# Altium PCB Buck_PCB.PcbDoc
Units mm, origin at the board's own origin, x right, y up, seen from the top; angles counter-clockwise.
Board outline 33.53 x 25.91 mm, 2 copper layers (Top Layer, Bottom Layer); 11 components, 6 nets, 30 pads, 5 vias.
Unrouted connection lines stored in the file: 7.
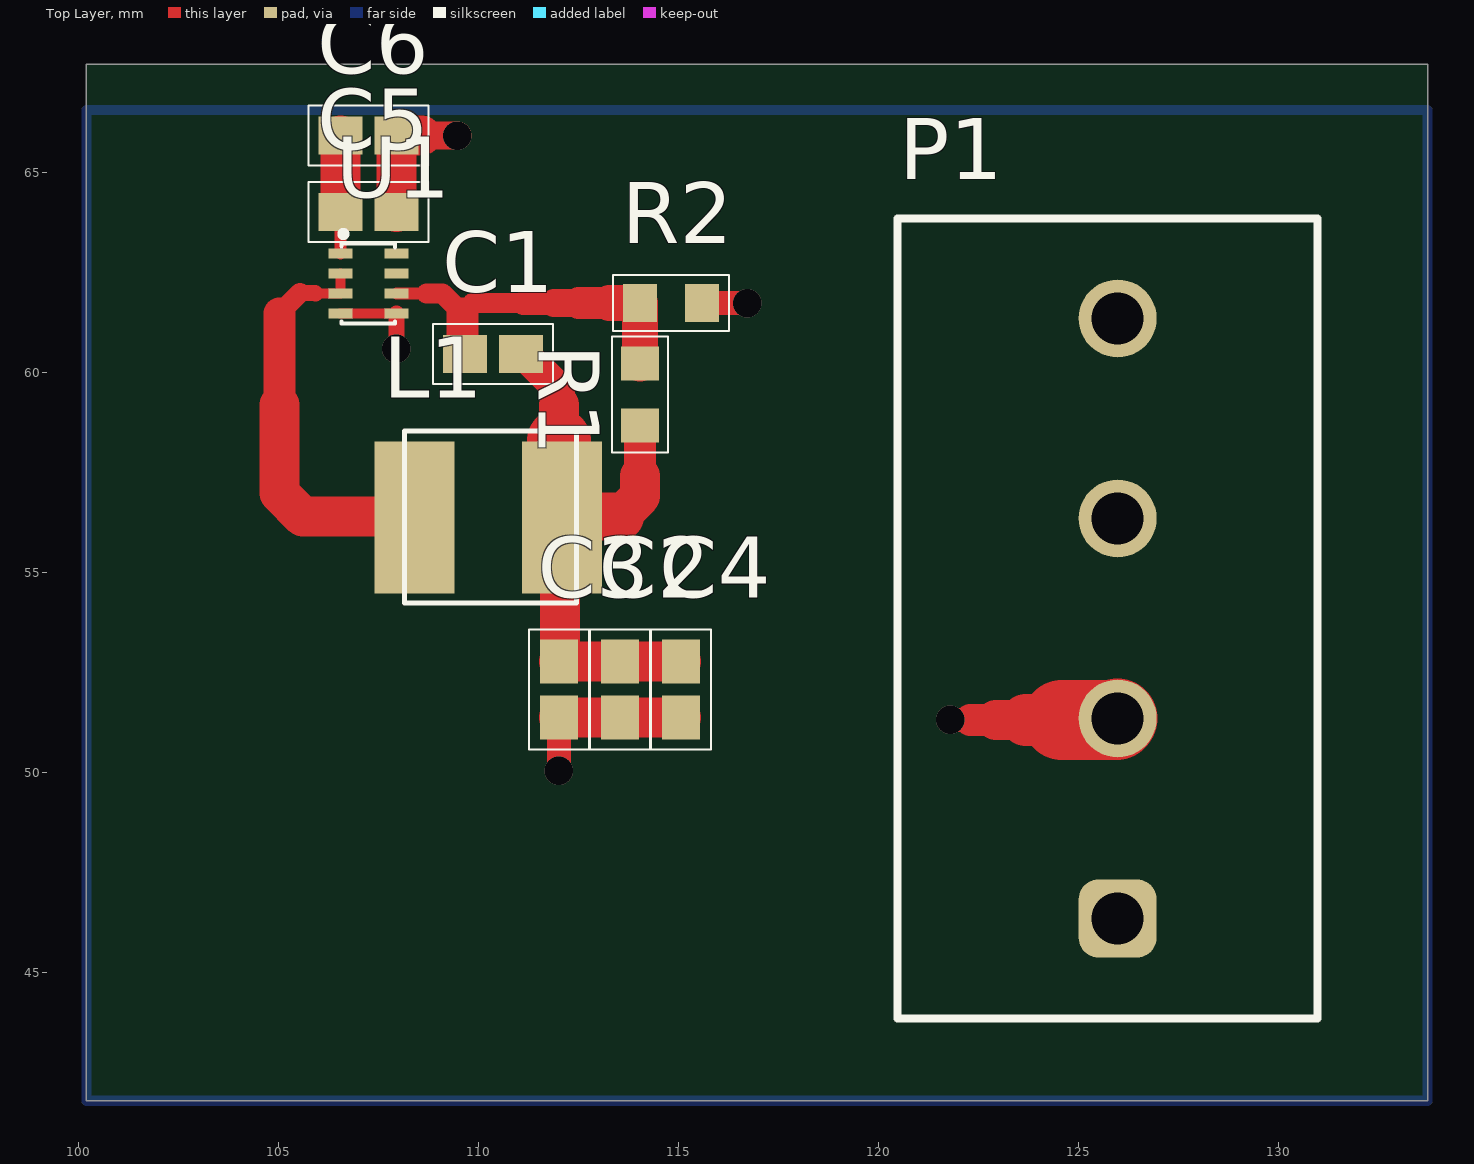
[diagram p0: Top Layer view]
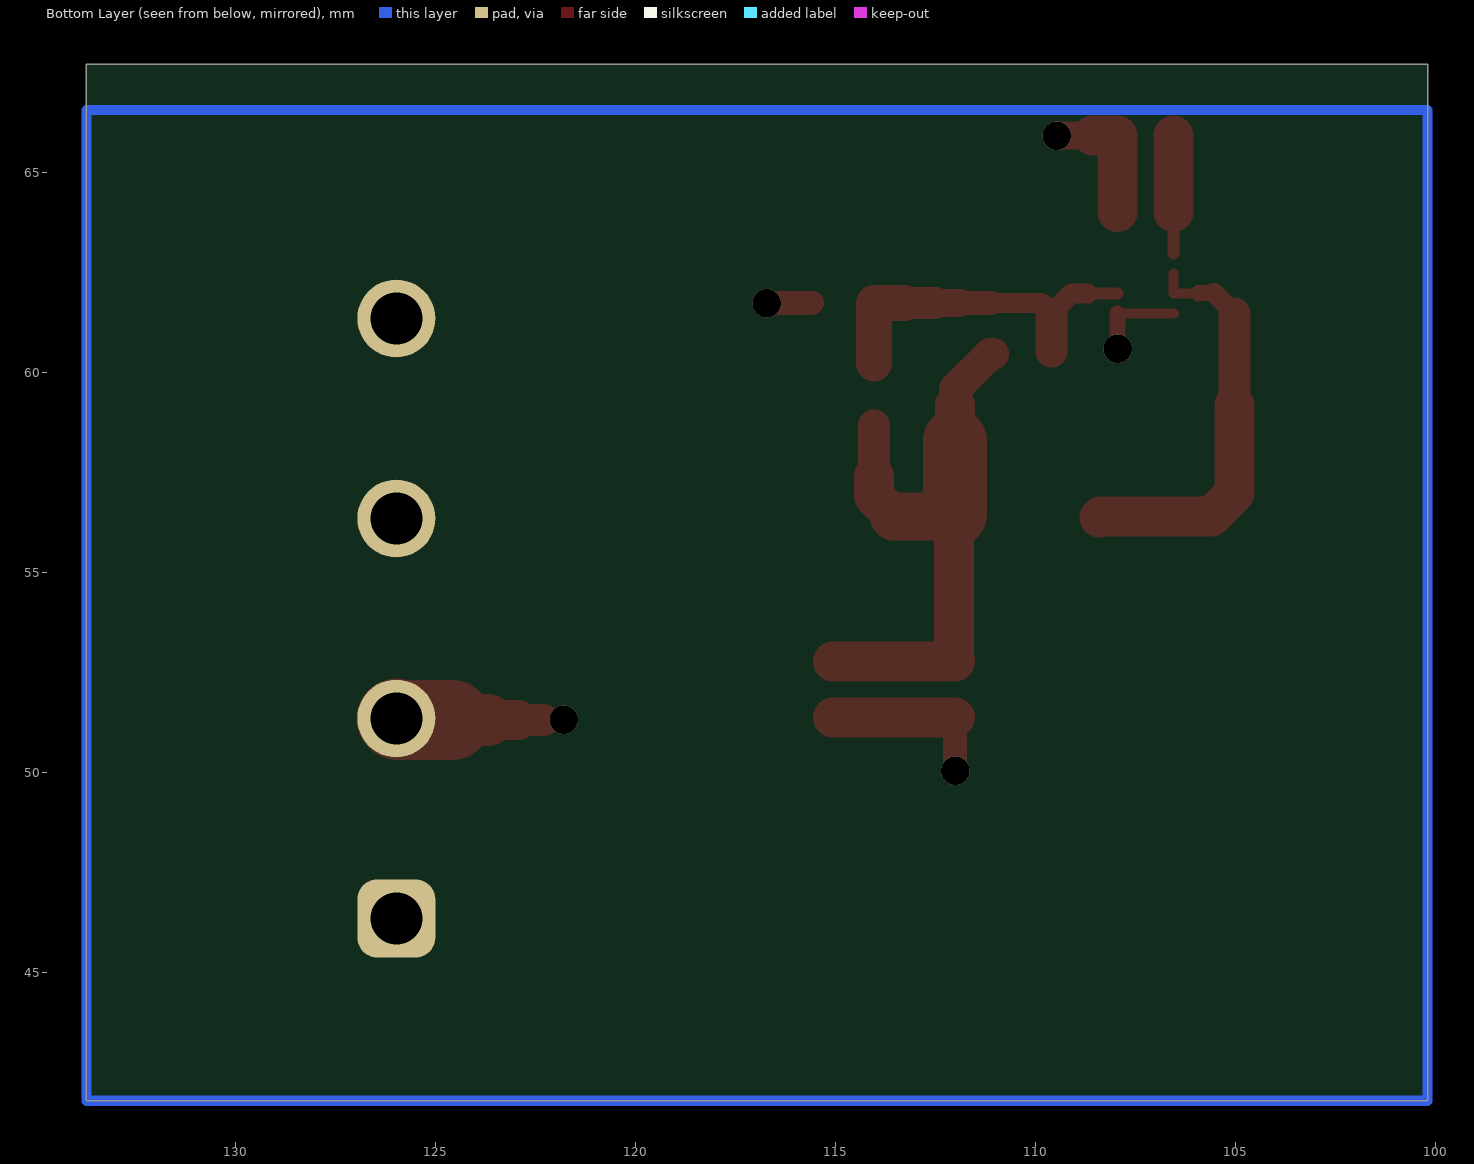
[diagram p1: Bottom Layer view, seen from below]
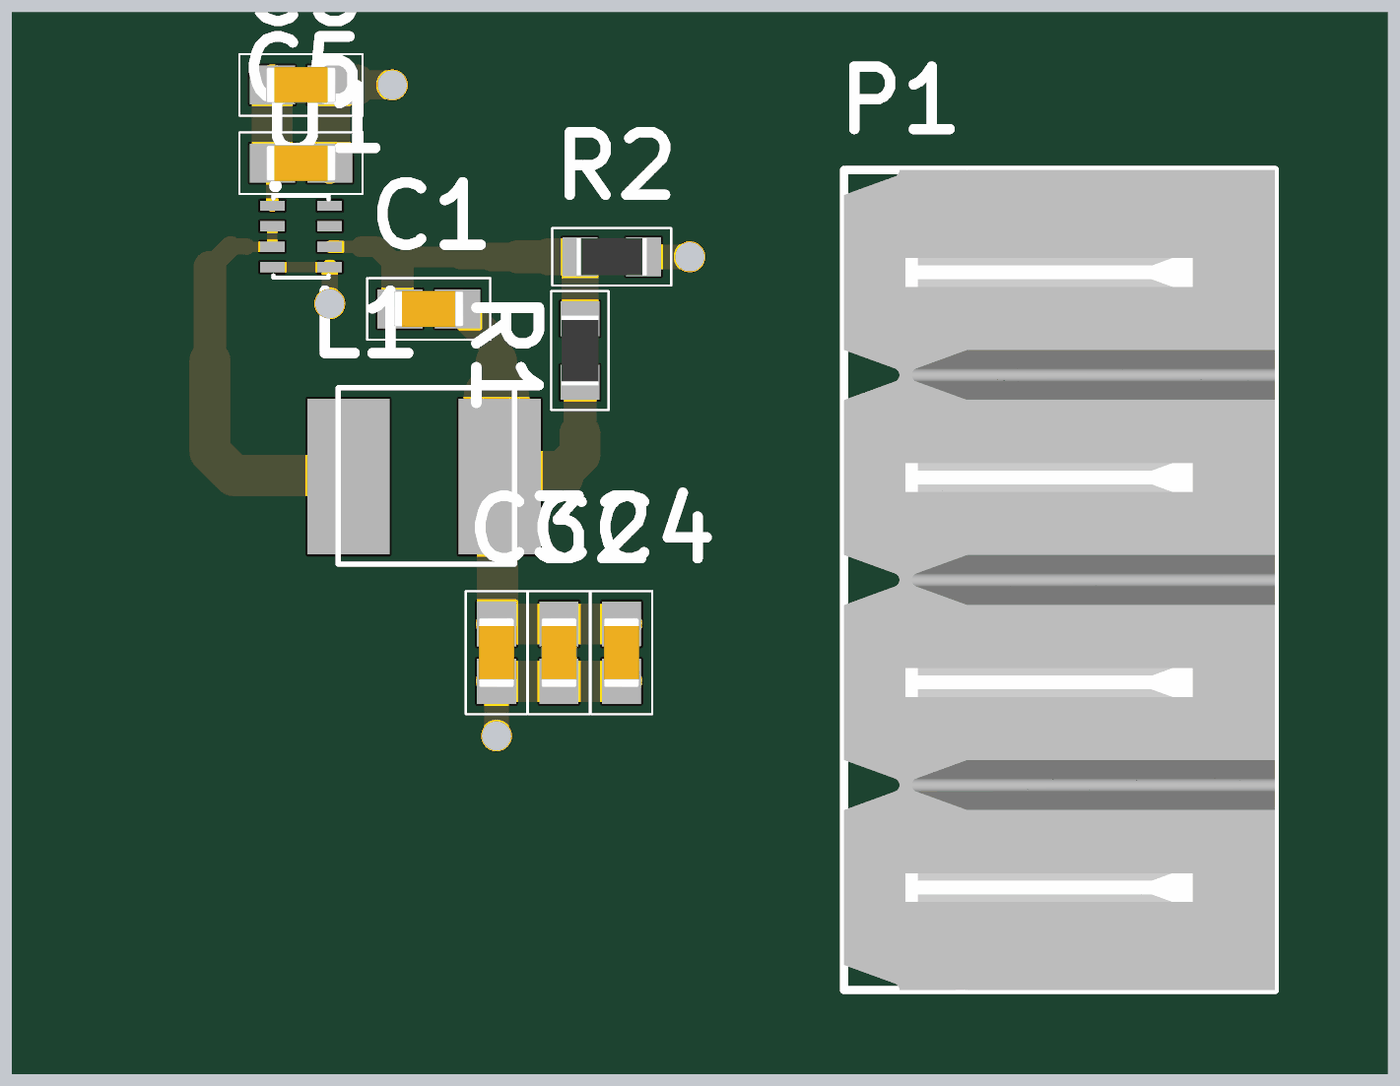
[diagram p2: 3D render of the assembled board from above, using the file's embedded part models]

## Layer stack, top to bottom
Top Solder: solder mask 0.0102, Solder Resist, Dk 3.5
Top Layer: signal copper 0.0356
Dielectric 1: dielectric 0.32, FR-4, Dk 4.8
Bottom Layer: signal copper 0.0356
Bottom Solder: solder mask 0.0102, Solder Resist, Dk 3.5

## Board outline
100.203,41.783 100.203,67.691 133.731,67.691 133.731,41.783

## Design rules (kind name [scope] priority, off if disabled: settings)
Clearance "Stitching No Net" [IsStitchingVia and InNet('No Net') vs (IsVia and (Not IsStitchingVia)) Or IsPad] p1: gap=0.127 ignorepadtopadclearanceinfootprint=FALSE
Clearance [All] p2: gap=0.2 ignorepadtopadclearanceinfootprint=TRUE except(0.102: Arc-Text Track-Text SMDPad-Text THPad-Text Fill-Text Poly-Text Region-Text Text-Text; 0.114: Arc-Arc Arc-Track Arc-SMDPad Arc-Via Track-Track Track-SMDPad Track-Via; 0.127: Via-Text; 0.152: Arc-THPad Track-THPad SMDPad-SMDPad SMDPad-THPad SMDPad-Via THPad-THPad THPad-Via Via-Via; 0.25: Arc-Hole Track-Hole SMDPad-Hole THPad-Hole Via-Hole Fill-Hole Poly-Hole Region-Hole Text-Hole)
ComponentClearance [All] p1: gap=0 collisioncheckmode=3 verticalgap=0 showdistances=FALSE
DiffPairsRouting DIFF90 [InDifferentialPairClass('All Differential Pairs')] p1: maxlimit=0.15 minlimit=0.15 mostfreqgap=0.15 toplayer_minwidth=0.141 toplayer_maxwidth=0.141 toplayer_prefwidth=0.141 bottomlayer_minwidth=0.137 bottomlayer_maxwidth=0.137 bottomlayer_prefwidth=0.137 impedanceprofiledriven=TRUE impedanceprofileid={235DA661-18AF-4E37-B827-B8E0859B5AF9} maxuncoupledlength=12.7
HoleSize [All] p1: absolutevalues=TRUE maxlimit=6.3 minlimit=0.2 maxpercent=80.000 minpercent=20.000
MinimumSolderMaskSliver [All] p1: minsoldermaskwidth=0.08
PlaneConnect [All] p1: pad.planeconnectstyle=Relief pad.reliefexpansion=0.508 pad.reliefentries=4 pad.reliefconductorwidth=0.508 pad.reliefairgap=0.254 via.planeconnectstyle=Direct via.reliefexpansion=0.508 via.reliefentries=4 via.reliefconductorwidth=0.508 via.reliefairgap=0.254
PolygonConnect [All] p1: connectstyle=Direct reliefconductorwidth=0.254 reliefentries=4 polygonreliefangle="90 Angle" airgapwidth=0.254
RoutingVias "General Vias" [All] p1: holewidth=0.2 width=0.45 viastyle="Through Hole" minholewidth=0.2 minwidth=0.45 maxholewidth=0.5 maxwidth=6.3
SilkToSilkClearance [All] p1: silktosilkclearance=0.15
SilkToSolderMaskClearance [IsPad] p1: minsilkscreentomaskgap=0.14 clearancetoexposedcopper=TRUE
SolderMaskExpansion [All] p1: expansion=0.038 istentingtop=FALSE
SupplyNets "Schematic Supply Nets" [InNet('GND')] p1: voltage=0.000
SupplyNets "Schematic Supply Nets_8" [InNet('VUSB')] p2: voltage=0.000
SupplyNets "Schematic Supply Nets_5" [InNet('VIN')] p3: voltage=0.000
SupplyNets "Schematic Supply Nets_3" [InNet('V_BAT')] p4: voltage=0.000
SupplyNets "Schematic Supply Nets_7" [InNet('+3V3S')] p5: voltage=0.000
SupplyNets "Schematic Supply Nets_2" [InNet('VCC')] p6: voltage=0.000
SupplyNets "Schematic Supply Nets_4" [InNet('VDD_ENV')] p7: voltage=0.000
SupplyNets "Schematic Supply Nets_1" [InNet('+3V3')] p8: voltage=0.000
UnRoutedNet [All] p1: checkbadconnections=TRUE
Width [All] p1: maxlimit=5 minlimit=0.1 preferedwidth=0.25
22 further rules are at their usual default settings.

## Classes and differential pairs
component class Buck: C1 C4 L1 P1 R1 R2 U1

## Components (designator, comment, footprint, x,y, rotation, side; value= is the part's Value field where it differs from the comment)
C1 "10pF" CAP_0603 110.363,60.452 r0 top
C2 "22µF" CAP_0603 113.538,52.07 r90 top
C3 "22µF" CAP_0603 112.014,52.07 r90 top
C4 "22µF" CAP_0603 115.062,52.07 r90 top
C5 "22µF" CAP_0603 107.25,64.008 r180 top
C6 "0.1µF" CAP_0603 107.25,65.913 r180 top
L1 "COILCRAFT/LPO2506IB-682" MPL-AL4020-R47 108.458,56.388 r0 top value=0.47uH
P1 "691386700004" CMP-1502-02092-3 125.734,53.841 r90 top
R1 "100k" RES_0603 114.046,59.436 r90 top
R2 "49.9k" RES_0603 114.821,61.722 r0 top
U1 "MP1608C" MP1608C_1 106.55,62.968 r0 top

## Footprints (in the part's own frame and the unit in brackets; to place one, negate y for a bottom-side part, rotate by r counter-clockwise, add the part's x,y. Pads: shape width x height; smd on the part's side, far side on the other; paste and mask are expansions set on the pad)
CAP_0603 [mm]
  rect 1.1x0.95 smd mask+0.05: 1(-0.7,0) 2(0.7,0)
  silkscreen extent -1.5,-0.75 1.5,0.75, body extent -0.85,-0.44 0.85,0.44, height 0.87
CMP-1502-02092-3 [mm] "5.00mm - PCB Header ( Horizontal / Vertical ), 04p"
  rrect50% 1.95x1.95 hole 1.3: 1(-7.5,-0.25)
  round 1.95 hole 1.3: 2(-2.5,-0.25) 3(2.5,-0.25) 4(7.5,-0.25)
  silkscreen extent -10,-5.25 10,5.25, body extent -10,-5.25 10,5.25, height 11
MP1608C_1 [mm]
  rect 0.6x0.25 smd mask+0.051: 1(0,0) 2(0,-0.5) 3(0,-1) 4(0,-1.5) 5(1.4,-1.5) 6(1.4,-1) 7(1.4,-0.5) 8(1.4,0)
  silkscreen extent 0.03,-1.75 1.37,0.51
MPL-AL4020-R47 [mm]
  rect 2x3.8 smd mask+0.051: 1(-0.051,-0.025) 2(3.632,-0.025)
  silkscreen extent -0.3,-2.16 4,2.14
RES_0603 [mm]
  rect 0.85x0.95 smd mask+0.05: 1(-0.775,0) 2(0.775,0)
  silkscreen extent -1.45,-0.7 1.45,0.7, body extent -0.85,-0.45 0.85,0.45, height 0.55

## Part data
C1 C2 C3 C4 C5 C6: library part CAP_0603, "Capacitor SMD 0603 Generic", Capacitance="100 nF", LCSC Part Number=C92490, Manufacturer=YAGEO, Manufacturer Part Number=CC0603KRX7R8BB104, Tolerance=10%
L1: library part TOKO106C, "TOKO106C"
P1: library part CMP-1502-02092-3, "Terminal Block, 5.00MM, Male Pcb Horizontal/vertical Cab Divisible, 4 Pins", Color=Grey, Current=14A, Max Operating Temperature=130°C, Min Operating Temperature=-30°C, Voltage=300V, Lead Pitch=5mm, Mount="Through Hole", Number of Levels=1, Number of Pins=4, Number of Positions=4, Number of Positions Per Level=4, Orientation=Vertical, Packaging=Box, Pitch=5.0038mm, RoHS=Compliant, Termination=Solder
R1 R2: library part RES_0603, "Resistor SMD 0603 Generic", LCSC Part Number=C5197511, Manufacturer=YAGEO, Manufacturer Part Number=NT0603BRD0711K1L, Resistance="11.1 kOhm", Tolerance=0.1%
U1: "The MP1608C is a monolithic, step-down switchmode converter with built-in internal power / MOSFETs. It achieves 6A of continuous output / current (IOUT) from a 2.4V to 5.5V input voltage / (VIN) range, with excellent load and line / regulation. The output voltage (VOUT) can be / regulated to as low as 0.4V. / The constant-on-time (COT) control scheme / provides fast transient response and facilitates / loop stabilization. Fault protections include / cycle-by-cycle current limiting and thermal / shutdown. / The MP1608C is well-suited for a wide range of / applications including high-performance digital / signal processors (DSPs), wireless power, / portable and mobile devices, and other lowpower systems. / The MP1608C requires a minimal number of / readily available, standard external components. / It is available in an ultra-small SOT583 package.", Feedback Voltage (Vfb)=0.6V, Input Voltage (Max)=5.5V, Input Voltage (Min)=2.4V, Manufacturer="Monolithic Power Systems (MPS)", Manufacturer Part Number=MP1608CGTL-P, Operating Junction Temp (Tj)="-40°C to +125°C", Output Current (Max)=6A, Package=SOT583-8, Switching Frequency=1.25MHz, Mounting Type="Surface Mount (SMD)"

## Via types
v1: diameter 0.711, hole 0.711, Top Layer to Bottom Layer, 5 vias

## Nets (pads, with @x,y where several pads share a name; then routed paths per layer and width w, separated by ;. In a path a pad name is that pad's centre, name@x,y a point inside that pad or via, vN(x,y) a via of type N, cw(c..) or ccw(c..) an arc to the next point about the centre after c; other vN are vias at no path point)
GND: C2.1 C3.1 C4.1 C5.1 C6.1 P1.2 R2.2 U1.4 U1.5 | length 15.6
  Top Layer w0.254: U1.4 U1.5 ; C4.1 C4.1@115.189,51.243
  Top Layer w0.4: v1(107.95,60.579) U1.5
  Top Layer w0.6: v1(112.014,50.038) C3.1 ; R2.2 v1(116.726,61.722) ; v1(121.793,51.308) 122.301,51.308
  Top Layer w0.7: 108.585,65.913 v1(109.474,65.913)
  Top Layer w0.8: 122.301,51.308 122.936,51.308
  Top Layer w1: C5.1 C6.1 108.585,65.913 ; C3.1 C2.1 C4.1 ; 122.936,51.308 123.698,51.308
  Top Layer w1.3: 123.698,51.308 124.587,51.308
  Top Layer w2: 124.587,51.308 125.951,51.308 P1.2
NetC1_1: C1.1 R1.2 R2.1 U1.6 | length 9
  Top Layer w0.3: U1.6 108.704,61.968
  Top Layer w0.5: 108.704,61.968 109.101,61.968 109.601,61.468 109.855,61.722 111.125,61.722
  Top Layer w0.6: C1.1@109.601,60.514 C1.1 ; 111.125,61.722 111.887,61.722
  Top Layer w0.7: 111.887,61.722 112.522,61.722
  Top Layer w0.8: C1.1@109.601,60.514 109.601,61.468 ; 112.522,61.722 113.284,61.722
  Top Layer w0.9: 113.284,61.722 R2.1 R1.2
NetL1_1: L1.1 U1.2 U1.3 | length 10.4
  Top Layer w0.25: 105.926,61.968 U1.3 U1.2
  Top Layer w0.4: 105.537,61.976 105.918,61.976 105.926,61.968
  Top Layer w0.5: 105.029,61.468 105.537,61.976
  Top Layer w0.8: 105.029,59.182 105.029,61.468
  Top Layer w1: 105.029,59.182 105.029,56.974 105.615,56.388 108.382,56.388 L1.1
PIN_EN: P1.4 U1.8
VIN: C5.2 C6.2 P1.1 U1.1 | length 2.9
  Top Layer w0.3: U1.1 106.55,64.002 C5.2@106.553,64.005
  Top Layer w0.5: C5.2 C5.2@106.553,64.005
  Top Layer w1: C5.2 C6.2
VOUT: C1.2 C2.2 C3.2 C4.2 L1.2 P1.3 R1.1 | length 15.2
  Top Layer w0.8: C1.2 111.138,60.452 112.014,59.576 112.014,59.182 ; 114.046,57.404 R1.1
  Top Layer w1: L1.2@112.014,56.439 112.039,56.414 112.039,52.795 C3.2 C2.2 C4.2 ; 112.014,58.293 112.014,59.182 ; 113.538,56.388 114.046,56.896 114.046,57.404
  Top Layer w1.2: L1.2@112.014,56.388 113.538,56.388
  Top Layer w1.6: L1.2@112.014,56.439 112.014,58.293
pads on no net: U1.7
copper on no net: | length 116.6
  Bottom Layer w0.254: 100.203,41.783 133.731,41.783 133.731,66.548 100.203,66.548 100.203,41.783

## Polygon pours and split planes (outlines as drawn)
GND on Bottom Layer "GND_L02_P002" (solid, pour order 2): 100.203,66.548 133.477,66.548 133.731,66.294 133.731,41.783 100.203,41.783 133.731,41.783 100.203,41.783
no net on Bottom Layer "NONET_L02_P001" (solid, pour order 1): 133.731,41.783 133.731,66.548 133.731,41.783 100.203,41.783 133.731,41.783 100.203,41.783
no net on Bottom Layer "NONET_L02_P000" (solid, pour order 0): 100.203,66.548 133.731,66.548 133.731,41.783 100.203,41.783 100.203,66.548 133.731,66.548 133.731,41.783 100.203,41.783

## Other copper
Multi-Layer:
  lines w0.254: 91.186,36.068 138.049,36.068 138.049,79.248 91.186,79.248 91.186,36.068